# EAGLE board ME433 (EAGLE 7.5.0)
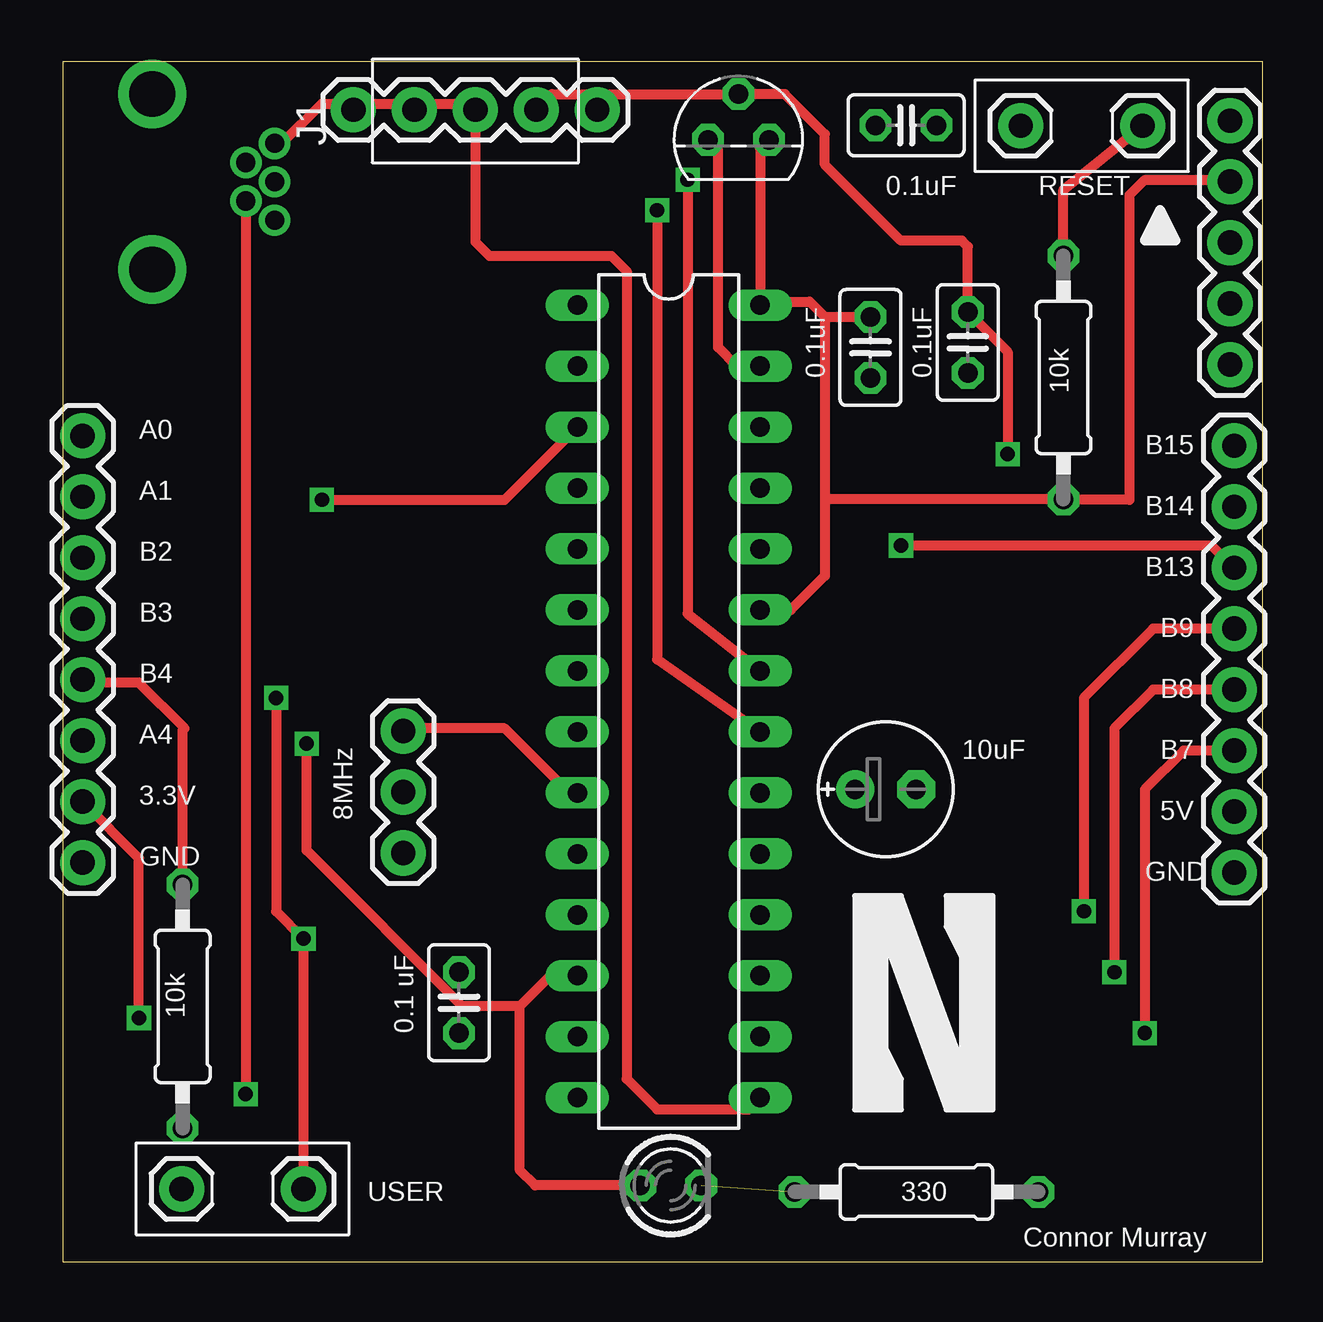
[diagram p0: board, top side]
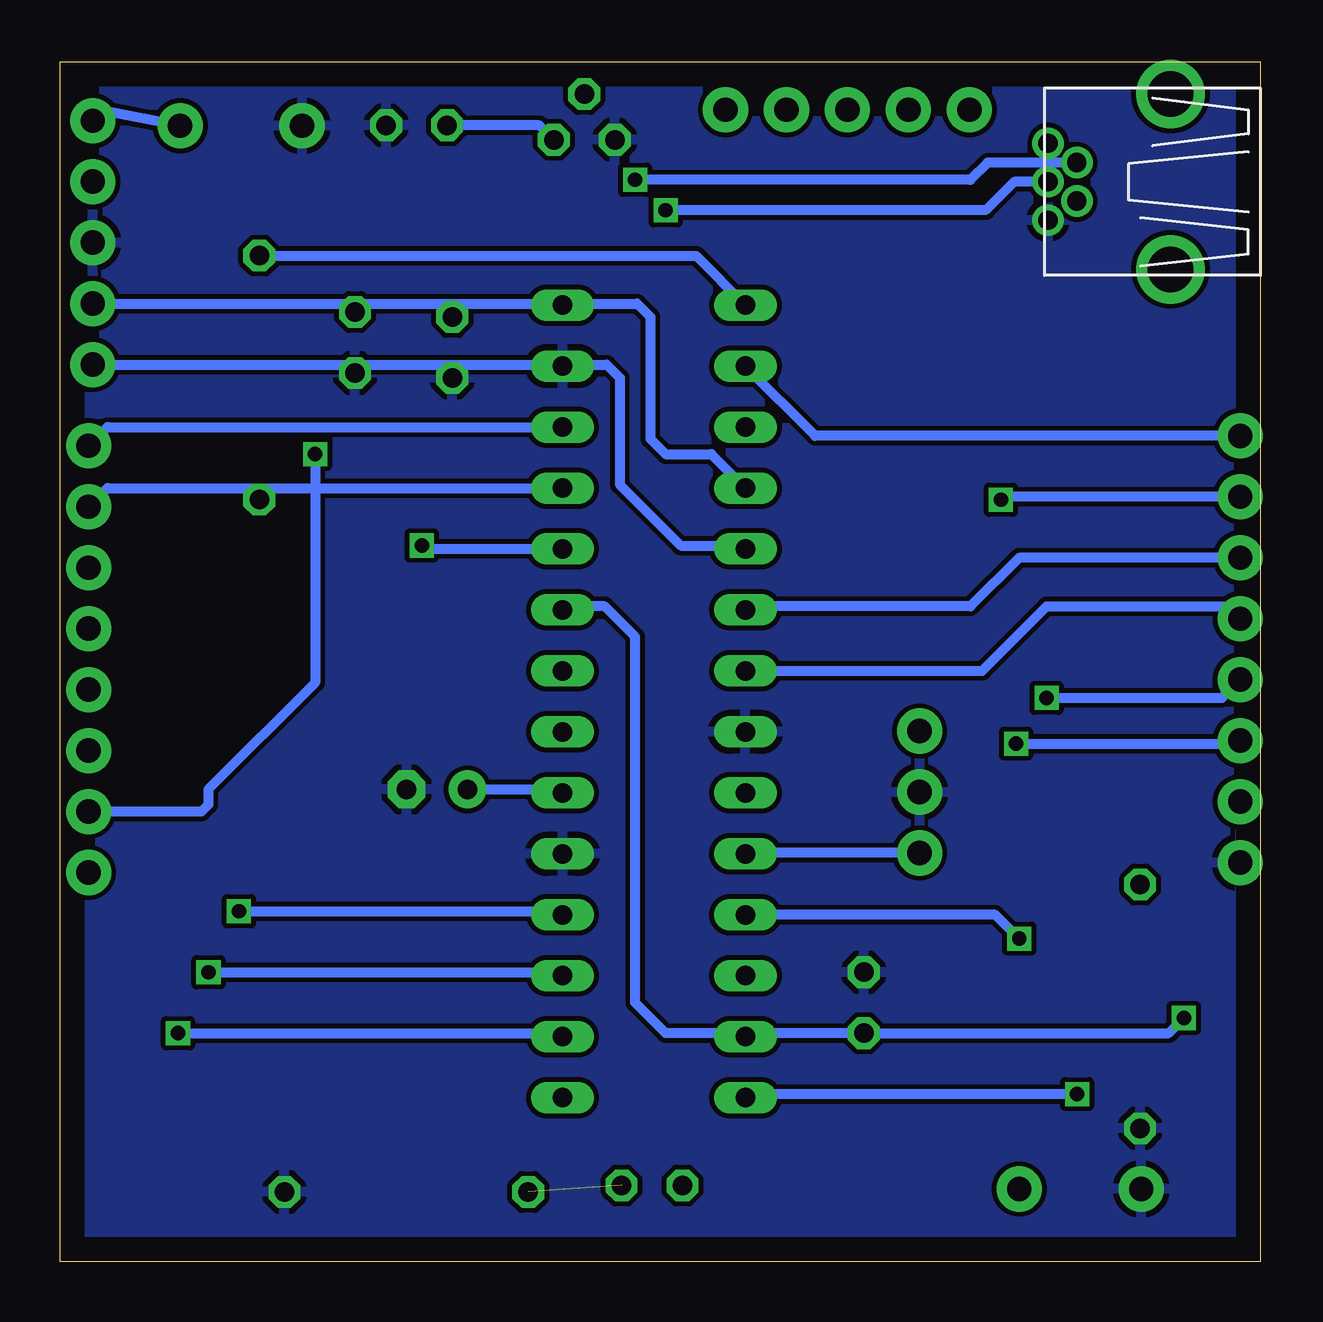
[diagram p1: board, bottom side, seen from below]

Size 50 x 50 mm. Coordinates in mm from the lower left corner, seen from the top.
Outline: 0,0 50,0 50,50 0,50 0,0
Copper layers (1*16): Top 0.035mm / dielectric 1.5mm / Bottom 0.035mm
Design rules "default": minimum track width 10mil, minimum drill 24mil, track to track 8mil, track to pad 8mil, pad to pad 8mil, via to via 8mil, smd to smd 8mil, copper to edge 40mil, drill to drill 8mil, minimum pad ring 10mil, minimum via ring 8mil, stop-mask expansion 4mil, vias tented up to drill 0mil, thermal gap 10mil

## Footprints (pad centres in the part's own frame; a part is rotated, then mirrored left to right if it is on the bottom)
E2,5-6E = drill 0.813 pad 1.575: + -1.27,0 | drill 0.813 pad 1.575 octagon: - 1.27,0
C025-025X050 = drill 0.813 octagon: 1 -1.27,0; 2 1.27,0
1X03 = drill 1.016 pad 1.88: 1 0,0; 2 2.54,0; 3 5.08,0
USB-MB-H = drill 0.8: D+ 5.1,0; D- 3.9,0.8; GND 5.1,-1.6; ID 3.9,-0.8; VBUS 5.1,1.6 | drill 1.9: P$6 0,-3.65; P$7 0,3.65
1X08_ROUND = drill 1.016 pad 1.88: 1 0,0; 2 2.54,0; 3 5.08,0; 4 7.62,0; 5 10.16,0; 6 12.7,0; 7 15.24,0; 8 17.78,0
LED3MM = drill 0.813 octagon: A -1.27,0; K 1.27,0
PUSHBUTTON = drill 1.016 pad 1.88: 1 -2.54,0; 3 2.54,0
1X05 = drill 1.016 pad 1.88: 1 0,0; 2 2.54,0; 3 5.08,0; 4 7.62,0; 5 10.16,0
0207/10 = drill 0.813 octagon: 1 -5.08,0; 2 5.08,0
DIL28-3 = drill 0.813 long: 1 -16.51,-3.81; 2 -13.97,-3.81; 3 -11.43,-3.81; 4 -8.89,-3.81; 5 -6.35,-3.81; 6 -3.81,-3.81; 7 -1.27,-3.81; 8 1.27,-3.81; 9 3.81,-3.81; 10 6.35,-3.81; 11 8.89,-3.81; 12 11.43,-3.81; 13 13.97,-3.81; 14 16.51,-3.81; 15 16.51,3.81; 16 13.97,3.81; 17 11.43,3.81; 18 8.89,3.81; 19 6.35,3.81; 20 3.81,3.81; 21 1.27,3.81; 22 -1.27,3.81; 23 -3.81,3.81; 24 -6.35,3.81; 25 -8.89,3.81; 26 -11.43,3.81; 27 -13.97,3.81; 28 -16.51,3.81
TO92 = drill 0.813 octagon: 1 -1.27,0; 2 0,1.905; 3 1.27,0
SLIDESWITCH = drill 1.016 pad 1.88: 1 -5.08,0; 2 -2.54,0; 3 0,0; 4 2.54,0; 5 5.08,0

## Placement (x,y rotation side)
10UF  [E2,5-6E]  34.29,19.68 0 top
C1  [C025-025X050]  33.66,38.1 270 top
C2  [C025-025X050]  16.51,10.79 90 top
C4  [C025-025X050]  37.71,38.3 270 top
C5  [C025-025X050]  35.14,47.35 0 top
CRYSTAL  [1X03]  14.19,17.04 90 top
J1  USB-MB-H  [USB-MB-H]  3.73,45 0 top
J2  [1X08_ROUND]  0.82,16.64 90 top
J3  [1X08_ROUND]  48.81,34 270 top
LED1  [LED3MM]  25.33,3.18 0 top
PB2  PUSHBUTTON  [PUSHBUTTON]  7.49,3.04 0 top
PB(MCLR)  PUSHBUTTON  [PUSHBUTTON]  42.45,47.34 180 top
PICKIT  [1X05]  48.63,37.38 90 top
R1  [0207/10]  41.7,36.84 270 top
R2  [0207/10]  5,10.64 90 top
R3  [0207/10]  35.57,2.91 180 top
U$1  PIC32MX250F128B  [DIL28-3]  25.25,23.35 270 top
U$4  MCP1702  [TO92]  28.16,46.75 0 top
U$5  SLIDESWITCH  [SLIDESWITCH]  17.19,48 0 top

## Library data of the parts
10UF C1 C2 C4 C5 CRYSTAL J1 LED1 PB2 PB(MCLR) PICKIT R1-R3 U$1 U$4 U$5 = ME433
J2 J3 = ME433; PROD_ID: CONN-08437

## Nets
+3V3: C1.1 C2.1 C5.1 J2.2 PICKIT.4 R1.2 U$1.13 U$1.23 U$1.28 U$4.3
+5V: C4.1 J3.7 U$4.2 U$5.4
A0: J2.8 U$1.2
A1: J2.7 U$1.3
A4: J2.3 LED1.A U$1.12
B2: J2.6 U$1.6
B3: J2.5 U$1.7
B4: J2.4 PB2.3 R2.2 U$1.11
B7: J3.6 U$1.16
B8: J3.5 U$1.17
B9: J3.4 U$1.18
B13: J3.3 U$1.24
B14: J3.2 U$1.25
B15: J3.1 U$1.26
D+: J1.D+ U$1.21
D-: J1.D- U$1.22
GND: 10UF.- C1.2 C2.2 C4.2 C5.2 CRYSTAL.2 J1.GND J2.1 PB2.1 PB(MCLR).3 PICKIT.3 R2.1 R3.1 U$1.8 U$1.19 U$1.27 U$4.1
MCLR: PB(MCLR).1 PICKIT.5 R1.1 U$1.1
N$1: CRYSTAL.3 U$1.9
N$2: 10UF.+ U$1.20
N$3: LED1.K R3.2
N$6: CRYSTAL.1 U$1.10
PGC: PICKIT.1 U$1.5
PGD: PICKIT.2 U$1.4
USBID: J1.ID U$1.14
VBUS: J1.VBUS U$1.15 U$5.3

## Tracks (layer width: path | path; a pad name or v marks a point on that pad's centre or on a via)
+3V3  (via drill 0.6)
  Top 0.406: v3.17,10.16 3.17,16.82 J2.2 | U$4.3 29.06,46.38 U$1.28 29.2,40.01 31.11,40.01 31.75,39.37 | 31.75,39.37 31.75,31.75 | 31.75,31.75 31.75,28.57 30.34,27.16 U$1.23 | 31.75,39.37 C1.1 | 31.75,31.75 31.77,31.77 R1.2 44.44,31.77 44.45,31.75 44.45,44.45 45.09,45.09 48.55,45.09 PICKIT.4
  Bottom 0.406: 21.3,9.53 C2.1 3.81,9.53 v3.17,10.16 | 21.3,9.53 U$1.13 | U$1.23 28.91,27.3 27.3,27.3 26.04,26.04 26.04,10.79 24.77,9.53 21.3,9.53 | U$4.3 30.03,47.35 C5.1
+5V  (via drill 0.6)
  Top 0.406: U$5.4 20.39,48.66 U$4.2 30.09,48.66 31.75,46.99 31.75,45.72 34.92,42.55 37.47,42.55 37.71,42.3 C4.1 39.37,37.91 v39.37,33.66
  Bottom 0.406: v39.37,33.66 39.37,24.13 43.81,19.68 43.81,19.05 44.1,18.76 J3.7
A0
  Bottom 0.406: J2.8 18.54,34.41 U$1.2
A1  (via drill 0.6)
  Top 0.406: v10.79,31.75 18.41,31.75 U$1.3
  Bottom 0.406: J2.7 10.67,31.88 v10.79,31.75
A4  (via drill 0.6)
  Top 0.406: U$1.12 20.32,11.92 19.05,10.65 | LED1.A 19.68,3.18 19.05,3.81 19.05,10.65 | 19.05,10.65 16.66,10.65 10.16,17.14 v10.16,21.59
  Bottom 0.406: v10.16,21.59 0.95,21.59 J2.3
B2
  Bottom 0.406: J2.6 10.04,29.34 12.06,27.3 21.59,27.3 | 22.23,27.3 21.59,27.3 | 21.59,27.3 U$1.6
B3
  Bottom 0.406: U$1.7 11.57,24.62 8.89,27.3 1.33,27.3 J2.5
B4  (via drill 0.6)
  Top 0.406: R2.2 5,22.14 5.08,22.23 3.17,24.13 0.95,24.13 J2.4 | v8.89,23.5 8.89,14.61 v10.03,13.46 PB2.3
  Bottom 0.406: v8.89,23.5 1.58,23.5 J2.4 | v10.03,13.46 11.03,14.46 U$1.11
B7  (via drill 0.6)
  Top 0.406: J3.6 46.7,21.3 45.09,19.68 v45.09,9.53
  Bottom 0.406: v45.09,9.53 29.2,9.53 U$1.16
B8  (via drill 0.6)
  Top 0.406: J3.5 45.43,23.84 43.81,22.23 v43.81,12.06
  Bottom 0.406: v43.81,12.06 29.2,12.06 U$1.17
B9  (via drill 0.6)
  Top 0.406: J3.4 45.43,26.38 42.55,23.5 v42.55,14.61
  Bottom 0.406: v42.55,14.61 29.2,14.61 U$1.18
B13  (via drill 0.6)
  Top 0.406: J3.3 47.88,29.84 v34.92,29.84
  Bottom 0.406: v34.92,29.84 34.78,29.7 U$1.24
B14
  Bottom 0.406: J3.2 48.03,32.24 U$1.25
B15
  Bottom 0.406: J3.1 48.03,34.78 U$1.26
D+  (via drill 0.6)
  Top 0.406: v24.77,43.81 24.77,25.11 U$1.21
  Bottom 0.406: J1.D+ 10.24,45 11.43,43.81 v24.77,43.81
D-  (via drill 0.6)
  Top 0.406: v26.04,45.09 26.04,27.01 U$1.22
  Bottom 0.406: J1.D- 11.35,45.8 12.06,45.09 v26.04,45.09
GND
  Top 0.406: U$1.27 28.09,37.32 27.3,38.1 27.3,46.33 U$4.1
  pour Bottom: 0,49.53 0,-0.64 50.8,-0.64 50.8,1.27 50.8,50.8 0,50.8
MCLR
  Top 0.406: R1.1 41.7,44.67 PB(MCLR).1
  Bottom 0.406: PB(MCLR).1 48.21,47.97 PICKIT.5 | R1.1 41.68,41.91 23.49,41.91 U$1.1
N$1
  Top 0.406: U$1.9 21.1,19.54 18.41,22.23 14.29,22.23 CRYSTAL.3
N$2
  Bottom 0.406: 10UF.+ 29.2,19.68 U$1.20
N$3  (1 unrouted)
N$6
  Bottom 0.406: CRYSTAL.1 21.41,17.04 U$1.10
PGC
  Bottom 0.406: PICKIT.1 27.23,37.38 26.67,36.83 26.67,32.38 24.13,29.84 21.59,29.84 U$1.5
PGD
  Bottom 0.406: PICKIT.2 25.95,39.92 25.4,39.37 25.4,34.29 24.77,33.66 22.86,33.66 U$1.4
USBID  (via drill 0.6)
  Top 0.406: J1.ID 7.63,8.27 v7.62,6.99
  Bottom 0.406: v7.62,6.99 21.3,6.99 U$1.14
VBUS
  Top 0.406: J1.VBUS 9.13,46.6 10.79,48.26 16.93,48.26 U$5.3 17.19,42.5 17.78,41.91 22.86,41.91 23.5,41.27 23.5,7.62 24.77,6.35 28.57,6.35 U$1.15

## Text on the board
tPlace: 0.1uF | RESET | 0.1uF | 0.1uF | 10k | A0 | B15 | A1 | B14 | B2 | B13 | B3 | B9 | B4 | B8 | A4 | 10uF | B7 | 3.3V | 8MHz | 5V | GND | GND | 10k | 0.1 uF | USER | 330 | Connor Murray